# EAGLE board cableado (EAGLE 6.5.0)

Size 100 x 80 mm. Coordinates in mm from the lower left corner, seen from the top.
Outline: 0,0 100,0 100,80 0,80 0,0
Copper layers (1*16): Top 0.035mm / dielectric 1.5mm / Bottom 0.035mm
Design rules "default": minimum track width 10mil, minimum drill 24mil, track to track 8mil, track to pad 8mil, pad to pad 8mil, via to via 8mil, smd to smd 8mil, copper to edge 40mil, drill to drill 8mil, minimum pad ring 10mil, minimum via ring 8mil, stop-mask expansion 4mil, vias tented up to drill 0mil, thermal gap 10mil

## Footprints (pad centres in the part's own frame; a part is rotated, then mirrored left to right if it is on the bottom)
SCREWTERMINAL-5MM-3 = drill 1.3 pad 2.413 square: 1 0,0 | drill 1.3 pad 2.413: 2 5,0; 3 10,0
MOLEX-1X6 = drill 1.016 pad 1.88 square: 1 0,0 | drill 1.016 pad 1.88: 2 2.54,0; 3 5.08,0; 4 7.62,0; 5 10.16,0; 6 12.7,0

## Placement (x,y rotation side)
EMISOR1  [SCREWTERMINAL-5MM-3]  -26.67,3.81 0 top  (outside the outline)
EMISOR2  [SCREWTERMINAL-5MM-3]  -26.67,12.7 0 top  (outside the outline)
MOTOR  [MOLEX-1X6]  -27.94,20.32 0 top  (outside the outline)
RECEPTOR1  [MOLEX-1X6]  -27.94,26.67 0 top  (outside the outline)
RECEPTOR2  [MOLEX-1X6]  -27.94,33.02 0 top  (outside the outline)

## Library data of the parts
EMISOR1 EMISOR2 = SparkFun-Connectors; STOREFRONT_ID: PRT-08433
MOTOR RECEPTOR1 RECEPTOR2 = SparkFun-Connectors

## Nets
24VAC: EMISOR1.3 EMISOR2.3 MOTOR.3 RECEPTOR1.6 RECEPTOR2.6
APERTURA: MOTOR.4
COMUN2: RECEPTOR1.2 RECEPTOR2.4
GND: MOTOR.5 RECEPTOR2.2
GNDAC: EMISOR1.1 EMISOR2.1 MOTOR.2 RECEPTOR1.5 RECEPTOR2.5
N$6: MOTOR.1
N$7: RECEPTOR1.1
N$9: EMISOR2.2
N$12: EMISOR1.2
N$18: RECEPTOR2.1
NA: RECEPTOR1.3
NA2: RECEPTOR2.3
SEGURIDAD: MOTOR.6 RECEPTOR1.4

## Tracks (layer width: path | path; a pad name or v marks a point on that pad's centre or on a via)
24VAC  (4 unrouted)
COMUN2  (1 unrouted)
GND  (1 unrouted)
GNDAC  (4 unrouted)
SEGURIDAD  (1 unrouted)